# EAGLE board boardfin (EAGLE 9.7.0)
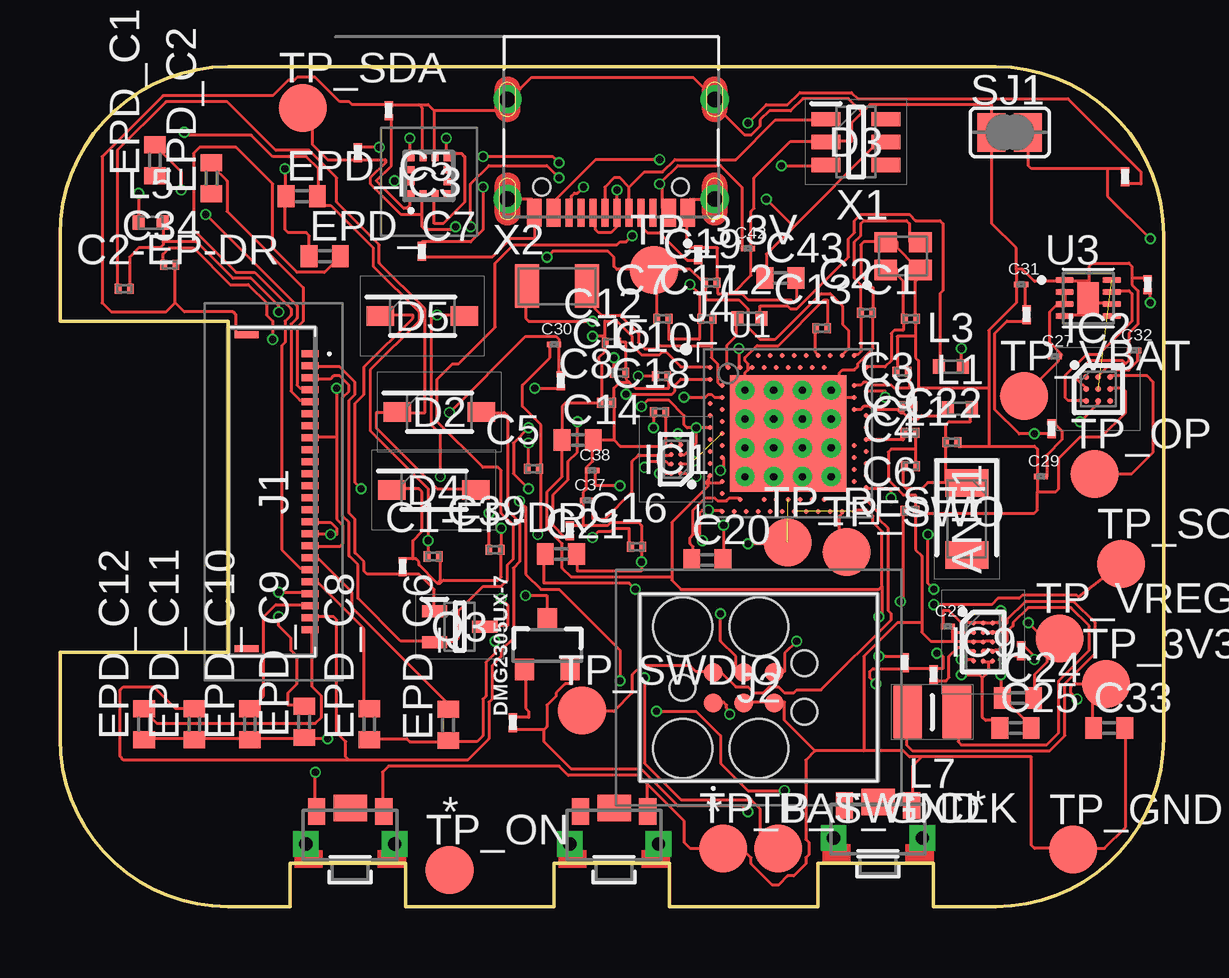
[diagram p0: board, top side]
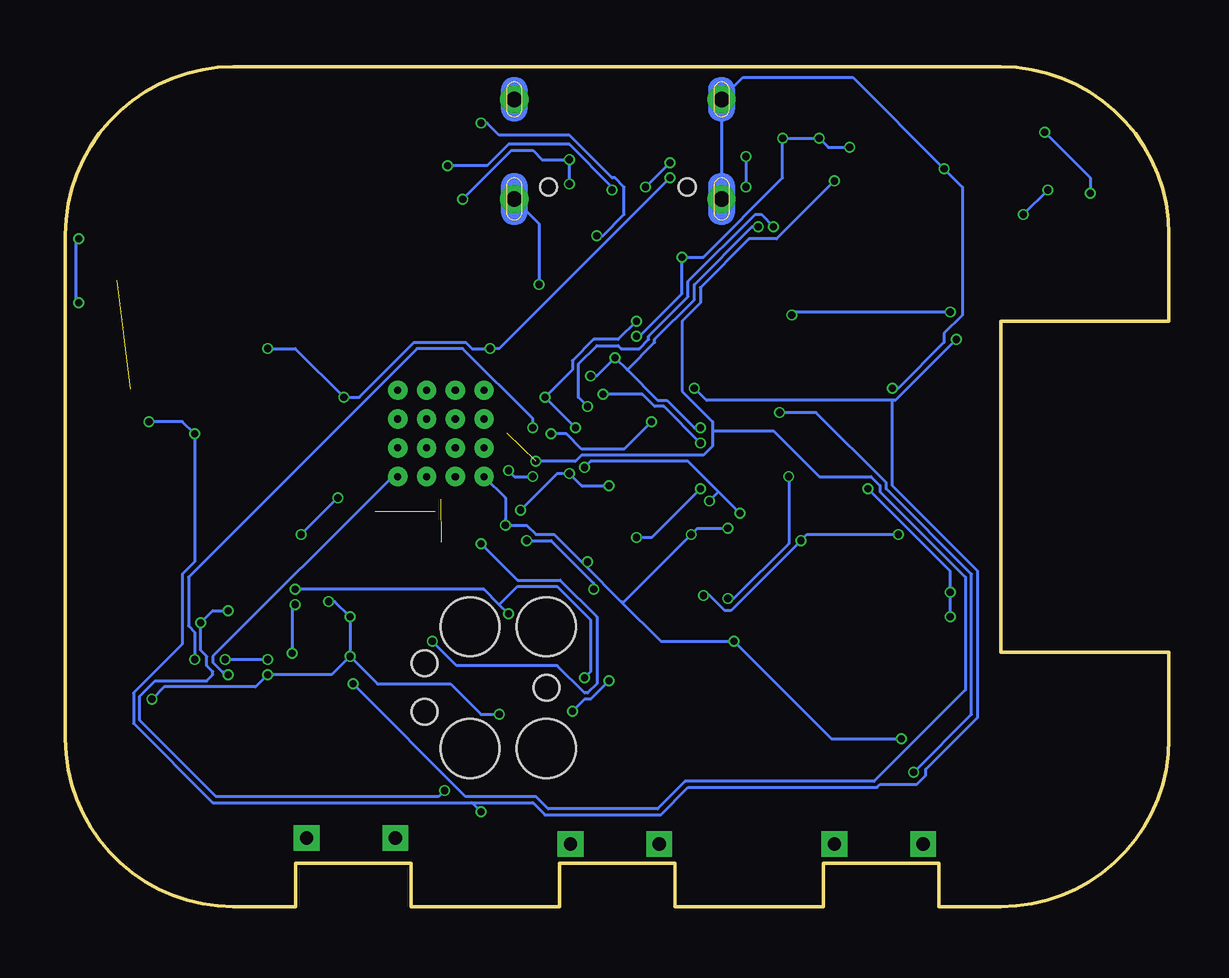
[diagram p1: board, bottom side, seen from below]

Size 46 x 35 mm. Coordinates in mm from the lower left corner, seen from the top.
Outline: 39,0 36.4,0 36.4,1.8 31.6,1.8 31.6,0 25.4,0 25.4,1.8 20.6,1.8 20.6,0 14.4,0 14.4,1.8 9.6,1.8 9.6,0 7,0 arc-90 0,7 0,10.6 7,10.6 7,24.4 0,24.4 0,28 arc-90 7,35 39,35 arc-90 46,28 46,7 arc-90 39,0
Copper layers (1*16): Top / Bottom
Stack-up Default Layer Stack: Top User Defined 0.035mm / Dielectric-1 User Defined 1.6mm / Bottom User Defined 0.035mm
Design rules: minimum drill size 0.3mm, minimum copper width 5mil, keepout clearance 0mil, drill distance 6mil, via restrict clearance 0mil, dimension clearance 0.2mm, restrict clearance 0mil, copper clearance wire_polygon to wire_polygon 5mil, copper clearance wire_polygon to pad_smd 5mil, copper clearance wire_polygon to via 5mil, copper clearance pad_smd to pad_smd 5mil, copper clearance pad_smd to via 5mil, copper clearance via to via 5mil, copper clearance smd to pad (same net) 5mil, copper clearance smd to via (same net) 5mil, copper clearance smd to smd (same net) 5mil

## Footprints (pad centres in the part's own frame; a part is rotated, then mirrored left to right if it is on the bottom)
2450AT18B100E_ANTC3216X140N = smd 1.15 x 1.8: 1 -1.5,0; 2 1.5,0
NORDIC_NRF_3_RESC0201_L = smd 0.28 x 0.43: 1 -0.255,0; 2 0.255,0
ESP32_C6_LIBRARY_1_ESP32_WROVER_EAGLE-LTSPICE_C0402 = smd 0.7 x 0.9: 1 -0.65,0; 2 0.65,0
GRM011R60J152KE01L_2_CAPC0201X13N = smd 0.22 x 0.23: 1 -0.185,0; 2 0.185,0
ESP32_C6_LIBRARY_5_SOD3716X135N = smd 1.15 x 0.8: 1 -1.75,0; 2 1.75,0
ESP32_C6_LIBRARY_3_SOT95P280X145-6N = smd 1.2 x 0.6: 1 -1.25,0.95; 2 -1.25,0; 3 -1.25,-0.95; 4 1.25,-0.95; 5 1.25,0; 6 1.25,0.95
ESP32_C6_LIBRARY_4_ESP32_C6_LIBRARY_4_ESP32_C6_LIBRARY_4_ESP32_C6_LIBRARY_4_ESP32_WROVER_SPARKFUN-DISCRETESEMI_SOT23-3 = smd 0.8 x 0.9: 1 -0.95,-1; 2 0.95,-1; 3 0,1.1
BQ25180YBGR_BGA8C40P2X4_100X155X50 = smd 0.2 x 0.2: A1 -0.2,0.6; A2 0.2,0.6; B1 -0.2,0.2; B2 0.2,0.2; C1 -0.2,-0.2; C2 0.2,-0.2; D1 -0.2,-0.6; D2 0.2,-0.6
DRV2605YZFR_BGA9C50P3X3_144X144X62 = smd 0.25 x 0.25: A1 -0.5,0.5; A2 0,0.5; A3 0.5,0.5; B1 -0.5,0; B2 0,0; B3 0.5,0; C1 -0.5,-0.5; C2 0,-0.5; C3 0.5,-0.5
BMA423_BMA423 = smd 0.3 x 0.35: 1 -0.75,-0.775; 2 -0.25,-0.775; 3 0.25,-0.775; 4 0.75,-0.775; 7 0.75,0.775; 8 0.25,0.775; 9 -0.25,0.775; 10 -0.75,0.775 | smd 0.35 x 0.3: 5 0.775,-0.25; 6 0.775,0.25; 11 -0.775,0.25; 12 -0.775,-0.25
RT6160AWSC_BGA15C40P3X5_140X230X60 = smd 0.216 x 0.216: A1 -0.4,0.8; A2 0,0.8; A3 0.4,0.8; B1 -0.4,0.4; B2 0,0.4; B3 0.4,0.4; C1 -0.4,0; C2 0,0; C3 0.4,0; D1 -0.4,-0.4; D2 0,-0.4; D3 0.4,-0.4; E1 -0.4,-0.8; E2 0,-0.8; E3 0.4,-0.8
503480-2400_5034802400 = smd 0.3 x 0.7: 1 -5.75,1.525; 2 -5.25,1.525; 3 -4.75,1.525; 4 -4.25,1.525; 5 -3.75,1.525; 6 -3.25,1.525; 7 -2.75,1.525; 8 -2.25,1.525; 9 -1.75,1.525; 10 -1.25,1.525; 11 -0.75,1.525; 12 -0.25,1.525; 13 0.25,1.525; 14 0.75,1.525; 15 1.25,1.525; 16 1.75,1.525; 17 2.25,1.525; 18 2.75,1.525; 19 3.25,1.525; 20 3.75,1.525; 21 4.25,1.525; 22 4.75,1.525; 23 5.25,1.525; 24 5.75,1.525 | smd 0.3 x 1: MP1 -6.54,-1.125; MP2 6.54,-1.125
TC2030-IDC_TC2030IDC = smd 0.783 x 0.783: 1 -0.953,-0.635; 2 -0.953,0.635; 3 0.317,-0.635; 4 0.317,0.635; 5 1.588,-0.635; 6 1.588,0.635 | hole 2.451: -2.223,-2.54; -2.223,2.54; 0.952,-2.54; 0.952,2.54 | hole 1.067: -2.223,0; 2.857,-1.016; 2.857,1.016
KH-TYPE-C-16P_KINGHELM_KH-TYPE-C-16P = smd 0.6 x 1.15: A1_B12 -3.2,4.725; A4_B9 -2.4,4.725; A9_B4 2.4,4.725; A12_B1 3.2,4.725 | smd 0.3 x 1.15: A5 -1.25,4.725; A6 -0.25,4.725; A7 0.25,4.725; A8 1.25,4.725; B5 1.75,4.725; B6 0.75,4.725; B7 -0.75,4.725; B8 -1.75,4.725 | drill 0.65 pad 1.05: SH1 -4.32,0; SH2 4.32,0; SH3 -4.32,4.15; SH4 4.32,4.15 | hole 0.7: -2.89,3.65; 2.89,3.65
NORDIC_NRF_2_RESC0402_L = smd 0.5 x 0.6: 1 -0.5,0; 2 0.5,0
MLP2016SR47MT0S1_INDC2016X100N = smd 1.2 x 2.2: 1 -1.028,0; 2 1.028,0
ESP32_C6_LIBRARY_6_SOT65P210X110-3N = smd 1.05 x 0.5: 1 -1.05,0.65; 2 -1.05,-0.65; 3 1.05,0
ERA-1AEB3401C_0201 = smd 0.35 x 0.25: 1 0,0.275; 2 0,-0.275
CPF0201D7K68C1_0201 = smd 0.35 x 0.25: 1 0,0.275; 2 0,-0.275
ESP32_C6_LIBRARY_7_JUMPER_SJ = smd 1.168 x 1.6: 1 -0.762,0; 2 0.762,0
2025-10-22_07-23-44_LIBRARY_SW_EVP-AKE31A_PAN = smd 0.711 x 1.092: 1 -1.4,-0.972; 2 1.4,-0.972 | drill 0.559 pad 0.914 square: 3 -1.848,0.381; 4 1.848,0.381 | smd 1.397 x 1.092: 5 0,-1.124
HECTOR_WATCH_1_TP20R = smd 2 x 2: TP 0,0
NORDIC_NRF_4_AQFN50P700X700X85_HS-74N = smd 4.85 x 4.85: P$74 0,0 | drill 0.3 pad 0.6: P$75 -1.8,1.8; P$76 -0.6,1.8; P$77 0.6,1.8; P$78 1.8,1.8; P$79 -1.8,0.6; P$80 -0.6,0.6; P$81 0.6,0.6; P$82 1.8,0.6; P$83 -1.8,-0.6; P$84 -0.6,-0.6; P$85 0.6,-0.6; P$86 1.8,-0.6; P$87 -1.8,-1.8; P$88 -0.6,-1.8; P$89 0.6,-1.8; P$90 1.8,-1.8 | smd 0.2 x 0.2: P$A8 -1.25,3.25; P$A10 -0.75,3.25; P$A12 -0.25,3.25; P$A14 0.25,3.25; P$A16 0.75,3.25; P$A18 1.25,3.25; P$A20 1.75,3.25; P$A22 2.25,3.25; P$A23 2.75,3.25; P$AA24 3.25,-2.25; P$AB2 -2.75,-2.5; P$AC5 -2,-2.75; P$AC9 -1,-2.75; P$AC11 -0.5,-2.75; P$AC13 0,-2.75; P$AC15 0.5,-2.75; P$AC17 1,-2.75; P$AC19 1.5,-2.75; P$AC21 2,-2.75; P$AC24 3.25,-2.75; P$AD2 -2.75,-3.25; P$AD4 -2.25,-3.25; P$AD6 -1.75,-3.25; P$AD8 -1.25,-3.25; P$AD10 -0.75,-3.25; P$AD12 -0.25,-3.25; P$AD14 0.25,-3.25; P$AD16 0.75,-3.25; P$AD18 1.25,-3.25; P$AD20 1.75,-3.25; P$AD22 2.25,-3.25; P$AD23 2.75,-3.25; P$B1 -3.25,2.75; P$B3 -2.5,2.75; P$B5 -2,2.75; P$B7 -1.5,2.75; P$B9 -1,2.75; P$B11 -0.5,2.75; P$B13 0,2.75; P$B15 0.5,2.75; P$B17 1,2.75; P$B19 1.5,2.75; P$B24 3.25,2.75; P$C1 -3.25,2.25; P$D2 -2.75,2; P$D23 2.75,2; P$E24 3.25,1.75; P$F2 -2.75,1.5; P$F23 2.75,1.5; P$G1 -3.25,1.25; P$H2 -2.75,1; P$H23 2.75,1; P$J1 -3.25,0.75; P$J24 3.25,0.75; P$K2 -2.75,0.5; P$L1 -3.25,0.25; P$L24 3.25,0.25; P$M2 -2.75,0; P$N1 -3.25,-0.25; P$N24 3.25,-0.25; P$P2 -2.75,-0.5; P$P23 2.75,-0.5; P$R1 -3.25,-0.75; P$R24 3.25,-0.75; P$T2 -2.75,-1; P$T23 2.75,-1; P$U1 -3.25,-1.25; P$U24 3.25,-1.25; P$V23 2.75,-1.5; P$W1 -3.25,-1.75; P$W24 3.25,-1.75; P$Y2 -2.75,-2; P$Y23 2.75,-2
ESP32_C6_LIBRARY_SON50P200X200X80-9N = smd 0.76 x 0.27: 1 -0.985,0.75; 2 -0.985,0.25; 3 -0.985,-0.25; 4 -0.985,-0.75; 5 0.985,-0.75; 6 0.985,-0.25; 7 0.985,0.25; 8 0.985,0.75 | smd 0.9 x 1.3: 9 0,0
NORDIC_NRF_BT-XTAL_2016_N = smd 0.95 x 0.85: 1 -0.725,-0.575; 2 0.725,-0.575; 3 0.725,0.575; 4 -0.725,0.575
NORDIC_NRF_1_XTAL_3215_N = smd 1 x 1.8: 1 -1.25,0; 2 1.25,0

## Placement (x,y rotation side)
ANT1  2450AT18B100E  [2450AT18B100E_ANTC3216X140N]  37.8,16.16 270 top
C1  12pF  [NORDIC_NRF_3_RESC0201_L]  35.45,24.5 0 top
C1-EP-DR  10uF  [NORDIC_NRF_3_RESC0201_L]  15.56,14.59 0 top
C2  12pF  [NORDIC_NRF_3_RESC0201_L]  33.62,24.75 0 top
C2-EP-DR  4.7uF/25V  [NORDIC_NRF_3_RESC0201_L]  2.68,25.75 0 top
C3  1pF  [NORDIC_NRF_3_RESC0201_L]  35.34,20.85 0 top
C4  1pF  [NORDIC_NRF_3_RESC0201_L]  35.45,18.35 0 top
C5  100nF  [NORDIC_NRF_3_RESC0201_L]  19.73,18.25 0 top
C6  4.7µF  [NORDIC_NRF_3_RESC0201_L]  35.43,16.5 0 top
C7  100nF  [NORDIC_NRF_3_RESC0201_L]  25.13,24.5 0 top
C8  100nF  [NORDIC_NRF_3_RESC0201_L]  22.78,21 0 top
C9  820pF  [NORDIC_NRF_3_RESC0201_L]  35.43,19.75 0 top
C10  N.C.  [NORDIC_NRF_3_RESC0201_L]  25.08,22.1 0 top
C11  100pF  [NORDIC_NRF_3_RESC0201_L]  35.1,22.29 180 top
C12  100nF  [NORDIC_NRF_3_RESC0201_L]  22.98,23.5 0 top
C13  N.C.  [NORDIC_NRF_3_RESC0201_L]  31.75,24.1 0 top
C14  4.7µF  [ESP32_C6_LIBRARY_1_ESP32_WROVER_EAGLE-LTSPICE_C0402]  21.58,19.45 0 top
C15  1.0µF  [NORDIC_NRF_3_RESC0201_L]  23.33,22.25 0 top
C16  47nF  [NORDIC_NRF_3_RESC0201_L]  24.04,15 0 top
C17  12pF  [NORDIC_NRF_3_RESC0201_L]  26.96,24.5 0 top
C18  12pF  [NORDIC_NRF_3_RESC0201_L]  24.99,20.6 0 top
C19  100nF  [NORDIC_NRF_3_RESC0201_L]  27.13,26 0 top
C20  4.7µF  [ESP32_C6_LIBRARY_1_ESP32_WROVER_EAGLE-LTSPICE_C0402]  26.98,14.45 0 top
C21  4.7µF  [ESP32_C6_LIBRARY_1_ESP32_WROVER_EAGLE-LTSPICE_C0402]  20.88,14.69 0 top
C22  N.C.  [NORDIC_NRF_3_RESC0201_L]  37.17,19.35 0 top
C23  0.1uF  [GRM011R60J152KE01L_2_CAPC0201X13N]  37.01,11.67 0 top
C24  10uF  [ESP32_C6_LIBRARY_1_ESP32_WROVER_EAGLE-LTSPICE_C0402]  39.93,8.7 0 top
C25  22uF  [ESP32_C6_LIBRARY_1_ESP32_WROVER_EAGLE-LTSPICE_C0402]  39.83,7.45 0 top
C27  0.1uF  [GRM011R60J152KE01L_2_CAPC0201X13N]  41.47,22.92 0 top
C29  1uF  [GRM011R60J152KE01L_2_CAPC0201X13N]  40.89,17.92 0 top
C30  1uF  [GRM011R60J152KE01L_2_CAPC0201X13N]  20.6,23.42 0 top
C31  1uF  [GRM011R60J152KE01L_2_CAPC0201X13N]  40.06,25.92 0 top
C32  1uF  [GRM011R60J152KE01L_2_CAPC0201X13N]  44.77,23.17 0 top
C33  22uF  [ESP32_C6_LIBRARY_1_ESP32_WROVER_EAGLE-LTSPICE_C0402]  43.73,7.45 0 top
C34  0.1uF  [NORDIC_NRF_3_RESC0201_L]  4.58,26.75 0 top
C37  1uF  [GRM011R60J152KE01L_2_CAPC0201X13N]  21.98,16.92 0 top
C38  1uF  [GRM011R60J152KE01L_2_CAPC0201X13N]  22.19,18.17 0 top
C39  10uF  [NORDIC_NRF_3_RESC0201_L]  18.14,14.87 0 top
C42  0.1uF  [GRM011R60J152KE01L_2_CAPC0201X13N]  28.68,27.42 0 top
C43  4.7uF  [ESP32_C6_LIBRARY_1_ESP32_WROVER_EAGLE-LTSPICE_C0402]  30.03,26.2 0 top
D2  ESP32_C6_LIBRARY_5_MBR0530  [ESP32_C6_LIBRARY_5_SOD3716X135N]  15.82,20.61 0 top
D3  USBLC6-2SC6Y  [ESP32_C6_LIBRARY_3_SOT95P280X145-6N]  33.18,31.86 0 top
D4  ESP32_C6_LIBRARY_5_MBR0530  [ESP32_C6_LIBRARY_5_SOD3716X135N]  15.59,17.36 0 top
D5  ESP32_C6_LIBRARY_5_MBR0530  [ESP32_C6_LIBRARY_5_SOD3716X135N]  15.11,24.61 0 top
DMG2305UX-7  20V/4.2A/52mΩ/1.4W  [ESP32_C6_LIBRARY_4_ESP32_C6_LIBRARY_4_ESP32_C6_LIBRARY_4_ESP32_C6_LIBRARY_4_ESP32_WROVER_SPARKFUN-DISCRETESEMI_SOT23-3]  20.31,10.88 0 top
EPD_C1  1uF/50V  [ESP32_C6_LIBRARY_1_ESP32_WROVER_EAGLE-LTSPICE_C0402]  3.96,31.1 90 top
EPD_C2  1uF/50V  [ESP32_C6_LIBRARY_1_ESP32_WROVER_EAGLE-LTSPICE_C0402]  6.32,30.35 90 top
EPD_C5  0.1uF/50V  [ESP32_C6_LIBRARY_1_ESP32_WROVER_EAGLE-LTSPICE_C0402]  10.08,29.6 0 top
EPD_C6  1uF/50V  [ESP32_C6_LIBRARY_1_ESP32_WROVER_EAGLE-LTSPICE_C0402]  16.18,7.57 90 top
EPD_C7  1uF/50V  [ESP32_C6_LIBRARY_1_ESP32_WROVER_EAGLE-LTSPICE_C0402]  11.04,27.1 0 top
EPD_C8  1uF/50V  [ESP32_C6_LIBRARY_1_ESP32_WROVER_EAGLE-LTSPICE_C0402]  12.9,7.6 90 top
EPD_C9  1uF/50V  [ESP32_C6_LIBRARY_1_ESP32_WROVER_EAGLE-LTSPICE_C0402]  10.18,7.7 90 top
EPD_C10  1uF/50V  [ESP32_C6_LIBRARY_1_ESP32_WROVER_EAGLE-LTSPICE_C0402]  7.92,7.6 90 top
EPD_C11  1uF/50V  [ESP32_C6_LIBRARY_1_ESP32_WROVER_EAGLE-LTSPICE_C0402]  5.6,7.6 90 top
EPD_C12  1uF/50V  [ESP32_C6_LIBRARY_1_ESP32_WROVER_EAGLE-LTSPICE_C0402]  3.51,7.6 90 top
IC1  BQ25180YBGR  [BQ25180YBGR_BGA8C40P2X4_100X155X50]  25.68,18.64 180 top
IC2  DRV2605YZFR  [DRV2605YZFR_BGA9C50P3X3_144X144X62]  43.28,21.57 0 top
IC3  BMA421  [BMA423_BMA423]  15.38,30.45 0 top
IC9  RT6160AWSC  [RT6160AWSC_BGA15C40P3X5_140X230X60]  38.48,11.03 0 top
J1  503480-2400  [503480-2400_5034802400]  8.9,17.29 270 top
J2  TC2030-IDC  [TC2030-IDC_TC2030IDC]  28.18,9.13 0 top
J4  KH-TYPE-C-16P  [KH-TYPE-C-16P_KINGHELM_KH-TYPE-C-16P]  22.97,33.64 180 top
L1  3.9nH  [NORDIC_NRF_2_RESC0402_L]  37.51,20.75 0 top
L2  10µH  [NORDIC_NRF_2_RESC0402_L]  28.73,24.5 0 top
L3  15nH  [NORDIC_NRF_2_RESC0402_L]  37.13,22.5 0 top
L5  68uH  [NORDIC_NRF_2_RESC0402_L]  3.78,28.5 0 top
L7  FTC252012SR47MBCA  [MLP2016SR47MT0S1_INDC2016X100N]  36.36,8.11 0 top
Q3  SI1308EDL-T1-GE3  [ESP32_C6_LIBRARY_6_SOT65P210X110-3N]  16.66,11.67 0 top
R1_EP_DR  0.47  [ERA-1AEB3401C_0201]  44.4,30.42 0 top
R1_USB  5K1  [CPF0201D7K68C1_0201]  26.61,27.17 0 top
R2  0  [CPF0201D7K68C1_0201]  40.07,10.67 0 top
R2_EP_DR  10K  [ERA-1AEB3401C_0201]  14.28,14.17 0 top
R2_USB  5K1  [ERA-1AEB3401C_0201]  15.08,27.31 0 top
R3  0  [ERA-1AEB3401C_0201]  13.7,33.17 0 top
R4  0  [CPF0201D7K68C1_0201]  36.41,9.67 0 top
R5  10k  [CPF0201D7K68C1_0201]  20.87,21.92 0 top
R7  10k  [CPF0201D7K68C1_0201]  41.33,19.92 0 top
R8  10k  [CPF0201D7K68C1_0201]  40.29,24.67 0 top
R9  10K  [ERA-1AEB3401C_0201]  21.25,15.67 0 top
R17  3K3  [CPF0201D7K68C1_0201]  35.21,10.17 0 top
R18  3K3  [CPF0201D7K68C1_0201]  12.42,31.42 0 top
R_PWR_EPD  10K  [CPF0201D7K68C1_0201]  18.88,7.67 0 top
R_TYPE_SEL  2.2  [ERA-1AEB3401C_0201]  45.34,25.92 0 top
SJ1  [ESP32_C6_LIBRARY_7_JUMPER_SJ]  39.59,32.26 0 top
SW_DN  2025-10-22_07-23-44_LIBRARY_EVP-AKE31ASW_EVP-AKE31A_PAN  [2025-10-22_07-23-44_LIBRARY_SW_EVP-AKE31A_PAN]  34.1,3.24 180 top
SW_ENT  2025-10-22_07-23-44_LIBRARY_EVP-AKE31ASW_EVP-AKE31A_PAN  [2025-10-22_07-23-44_LIBRARY_SW_EVP-AKE31A_PAN]  23.1,2.99 180 top
SW_UP  2025-10-22_07-23-44_LIBRARY_EVP-AKE31ASW_EVP-AKE31A_PAN  [2025-10-22_07-23-44_LIBRARY_SW_EVP-AKE31A_PAN]  12.1,2.99 180 top
TP_3.3V  HECTOR_WATCH_1_TPTP20R  [HECTOR_WATCH_1_TP20R]  24.76,26.53 0 top
TP_3V3  HECTOR_WATCH_1_TPTP20R  [HECTOR_WATCH_1_TP20R]  43.61,9.28 0 top
TP_BAT_GND  HECTOR_WATCH_1_TPTP20R  [HECTOR_WATCH_1_TP20R]  27.64,2.43 0 top
TP_GND  HECTOR_WATCH_1_TPTP20R  [HECTOR_WATCH_1_TP20R]  42.23,2.38 0 top
TP_ON  HECTOR_WATCH_1_TPTP20R  [HECTOR_WATCH_1_TP20R]  16.24,1.53 0 top
TP_OP  HECTOR_WATCH_1_TPTP20R  [HECTOR_WATCH_1_TP20R]  43.12,18.03 0 top
TP_RESET  HECTOR_WATCH_1_TPTP20R  [HECTOR_WATCH_1_TP20R]  30.33,15.18 0 top
TP_SCL  HECTOR_WATCH_1_TPTP20R  [HECTOR_WATCH_1_TP20R]  44.23,14.28 0 top
TP_SDA  HECTOR_WATCH_1_TPTP20R  [HECTOR_WATCH_1_TP20R]  10.12,33.28 0 top
TP_SWDCLK  HECTOR_WATCH_1_TPTP20R  [HECTOR_WATCH_1_TP20R]  29.94,2.43 0 top
TP_SWDIO  HECTOR_WATCH_1_TPTP20R  [HECTOR_WATCH_1_TP20R]  21.76,8.18 0 top
TP_SWO  HECTOR_WATCH_1_TPTP20R  [HECTOR_WATCH_1_TP20R]  32.79,14.78 0 top
TP_VBAT  HECTOR_WATCH_1_TPTP20R  [HECTOR_WATCH_1_TP20R]  40.18,21.28 0 top
TP_VREG  HECTOR_WATCH_1_TPTP20R  [HECTOR_WATCH_1_TP20R]  41.67,11.18 0 top
U1  NRF52840_QF  [NORDIC_NRF_4_AQFN50P700X700X85_HS-74N]  30.35,19.72 0 top
U3  MAX17048G+T10  [ESP32_C6_LIBRARY_SON50P200X200X80-9N]  42.86,25.36 0 top
X1  32MHz  [NORDIC_NRF_BT-XTAL_2016_N]  35.14,27.11 0 top
X2  32.768kHz  [NORDIC_NRF_1_XTAL_3215_N]  20.72,25.86 0 top

## Library data of the parts
ANT1 = InkTime_v5 (1); ARROW_PART_NUMBER: 2450AT18B100E; ARROW_PRICE-STOCK: https://www.arrow.com/en/products/2450at18b100e/johanson-dielectrics?utm_currency=USD&region=nac; DESCRIPTION: Antennas 2.45GHz ANTENNA; HEIGHT: 1.4mm; MANUFACTURER_NAME: JOHANSON TECHNOLOGY; MANUFACTURER_PART_NUMBER: 2450AT18B100E; MOUSER_PART_NUMBER: 609-2450AT18B100E; MOUSER_PRICE-STOCK: https://www.mouser.co.uk/ProductDetail/Johanson-Technology/2450AT18B100E?qs=yCnrNFeXz%252Bh5MFsFIXGZGA%3D%3D
C1 C1-EP-DR C2 C2-EP-DR C3-C13 C15-C19 C22 C34 C39 L1-L3 L5 R1_EP_DR R1_USB R2 R2_EP_DR R2_USB R3-R5 R7-R9 R17 R18 R_PWR_EPD R_TYPE_SEL SJ1 TP_3.3V TP_3V3 TP_BAT_GND TP_GND TP_ON TP_OP TP_RESET TP_SCL TP_SDA TP_SWDCLK TP_SWDIO TP_SWO TP_VBAT TP_VREG U1 X1 X2 = InkTime_v5 (1)
C14 C20 C21 C24 C25 C33 C43 EPD_C1 EPD_C2 EPD_C5-EPD_C12 = InkTime_v5 (1); SPICEMODEL: NONE; SPICEPREFIX: C
C23 C27 C29-C32 C37 C38 C42 = InkTime_v5 (1); AVAILABILITY: In Stock; CHECK_PRICES: https://www.snapeda.com/parts/GRM011R60J152KE01L/Murata/view-part/?ref=eda; DESCRIPTION: SMD Capacitor X5R(EIA) with Capacitance: 1500pF Tol. 10%. Rated Voltage: 6.3Vdc; MF: Murata; MP: GRM011R60J152KE01L; PACKAGE: 0201 Murata; PRICE: None; SNAPEDA_LINK: https://www.snapeda.com/parts/GRM011R60J152KE01L/Murata/view-part/?ref=snap
D2 D4 D5 = InkTime_v5 (1); AVAILABILITY: In Stock; CHECK_PRICES: https://www.snapeda.com/parts/MBR0530/Onsemi/view-part/?ref=eda; DESCRIPTION: Diode Schottky 30 V 500mA Surface Mount SOD-123; MF: ON Semiconductor; MP: MBR0530; PACKAGE: SOD-123-2 ON Semiconductor; PRICE: None; PURCHASE-URL: https://www.snapeda.com/api/url_track_click_mouser/?unipart_id=179458&manufacturer=ON Semiconductor&part_name=MBR0530&search_term=None; SNAPEDA_LINK: https://www.snapeda.com/parts/MBR0530/Onsemi/view-part/?ref=snap
D3 = InkTime_v5 (1); AVAILABILITY: In Stock; CHECK_PRICES: https://www.snapeda.com/parts/USBLC6-2SC6Y/STMicroelectronics/view-part/?ref=eda; DESCRIPTION: 17V Clamp 5A (8/20µs) Ipp Tvs Diode Surface Mount SOT-23-6; MF: STMicroelectronics; MP: USBLC6-2SC6Y; PACKAGE: SOT-23-6 STMicroelectronics; PRICE: None; SNAPEDA_LINK: https://www.snapeda.com/parts/USBLC6-2SC6Y/STMicroelectronics/view-part/?ref=snap
DMG2305UX-7 = InkTime_v5 (1); PROD_ID: TRAN-14388
IC1 = InkTime_v5 (1); ARROW_PART_NUMBER: BQ25180YBGR; ARROW_PRICE-STOCK: https://www.arrow.com/en/products/bq25180ybgr/texas-instruments?utm_currency=USD&region=nac; DESCRIPTION: Charger IC Lithium Ion/Polymer, Lithium Iron Phosphate 8-DSBGA (1.6x1.1); HEIGHT: 0.5mm; MANUFACTURER_NAME: Texas Instruments; MANUFACTURER_PART_NUMBER: BQ25180YBGR; MOUSER_PART_NUMBER: 595-BQ25180YBGR; MOUSER_PRICE-STOCK: https://www.mouser.co.uk/ProductDetail/Texas-Instruments/BQ25180YBGR?qs=doiCPypUmgEWjAK%252BJAX6Tw%3D%3D
IC2 = InkTime_v5 (1); ARROW_PART_NUMBER: DRV2605YZFR; ARROW_PRICE-STOCK: https://www.arrow.com/en/products/drv2605yzfr/texas-instruments?region=nac; DESCRIPTION: Haptic Driver for ERM/LRA with Built-In Library and Smart Loop Architecture; HEIGHT: 0.625mm; MANUFACTURER_NAME: Texas Instruments; MANUFACTURER_PART_NUMBER: DRV2605YZFR
IC3 = InkTime_v5 (1); ARROW_PART_NUMBER: BMA423; ARROW_PRICE-STOCK: https://www.arrow.com/en/products/bma423/bosch; DESCRIPTION: Accelerometers Triaxial low-g 12bit Acceleration Sensor; HEIGHT: 1mm; MANUFACTURER_NAME: BOSCH; MANUFACTURER_PART_NUMBER: BMA423; MOUSER_PART_NUMBER: 262-BMA423; MOUSER_PRICE-STOCK: https://www.mouser.co.uk/ProductDetail/Bosch-Sensortec/BMA423?qs=HXFqYaX1Q2xC%252BSgeGoX3mg%3D%3D
IC9 = InkTime_v5 (1); DESCRIPTION: Buck-Boost Regulator Positive Output Step-Up/Step-Down I2C DC-DC Controller IC 15-WL-CSP (BSC) (1.4x2.3); HEIGHT: 0.6mm; MANUFACTURER_NAME: RICHTEK; MANUFACTURER_PART_NUMBER: RT6160AWSC; MOUSER_PART_NUMBER: 835-RT6160AWSC; MOUSER_PRICE-STOCK: https://www.mouser.co.uk/ProductDetail/Richtek/RT6160AWSC?qs=amGC7iS6iy%2FLd9PSoixZXQ%3D%3D
J1 = InkTime_v5 (1); DESCRIPTION: FFC & FPC Connectors 0.5mm FPC RA SMT Dual Contact 24Ckt; HEIGHT: 1.87mm; MANUFACTURER_NAME: Molex; MANUFACTURER_PART_NUMBER: 503480-2400; MOUSER_PART_NUMBER: 538-503480-2400; MOUSER_PRICE-STOCK: https://www.mouser.co.uk/ProductDetail/Molex/503480-2400?qs=OAhjpuo3Vu7efIoxFh9AOw%3D%3D
J2 = InkTime_v5 (1); DESCRIPTION: CABLE ADAPTER 6 POS; HEIGHT: 19mm; MANUFACTURER_NAME: Tag Connect; MANUFACTURER_PART_NUMBER: TC2030-IDC
J4 = InkTime_v5 (1); AVAILABILITY: Not in stock; CHECK_PRICES: https://www.snapeda.com/parts/KH-TYPE-C-16P/Kinghelm/view-part/?ref=eda; MF: kinghelm; MP: KH-TYPE-C-16P; PACKAGE: None; PRICE: None; SNAPEDA_LINK: https://www.snapeda.com/parts/KH-TYPE-C-16P/Kinghelm/view-part/?ref=snap
L7 = InkTime_v5 (1); DESCRIPTION: SMD / SMT Inductors (Coils), L=0.47?H, L x W x T :; HEIGHT: 1mm; JLCPCB: https://jlcpcb.com/partdetail/6763488-FTC252012SR47MBCA/C5832368; MANUFACTURER_NAME: TDK; MANUFACTURER_PART_NUMBER: FTC252012SR47MBCA
Q3 = InkTime_v5 (1); AVAILABILITY: In Stock; CHECK_PRICES: https://www.snapeda.com/parts/SI1308EDL-T1-GE3/Vishay+Siliconix/view-part/?ref=eda; DESCRIPTION: Si1308EDL-T1-GE3 N-channel MOSFET Transistor, 1.5 A, 30 V, 3-Pin SC-70 | Siliconix / Vishay SI1308EDL-T1-GE3; MF: Vishay Siliconix; MP: SI1308EDL-T1-GE3; PACKAGE: SOT-323 Vishay Semiconductor; PRICE: None; PURCHASE-URL: https://www.snapeda.com/api/url_track_click_mouser/?unipart_id=274603&manufacturer=Vishay Siliconix&part_name=SI1308EDL-T1-GE3&search_term=None; SNAPEDA_LINK: https://www.snapeda.com/parts/SI1308EDL-T1-GE3/Vishay+Siliconix/view-part/?ref=snap
SW_DN SW_ENT SW_UP = InkTime_v5 (1); COPYRIGHT: Copyright (C) 2025 Ultra Librarian. All rights reserved.; DIGI-KEY_PART_NUMBER_1: P123437TR-ND; DIGI-KEY_PART_NUMBER_2: P123437CT-ND; DIGI-KEY_PART_NUMBER_3: P123437DKR-ND; MANUFACTURER_NAME: Panasonic; MANUFACTURER_PART_NUMBER: EVP-AKE31A
U3 = InkTime_v5 (1); AVAILABILITY: In Stock; CHECK_PRICES: https://www.snapeda.com/parts/MAX17048G+T10/Analog+Devices/view-part/?ref=eda; DESCRIPTION: 3µA 1-Cell/2-Cell Fuel Gauge with ModelGauge; MF: Analog Devices; MP: MAX17048G+T10; PACKAGE: TDFN-8 Maxim; PRICE: None; PURCHASE-URL: https://www.snapeda.com/api/url_track_click_mouser/?unipart_id=329239&manufacturer=Analog Devices&part_name=MAX17048G+T10&search_term=None; SNAPEDA_LINK: https://www.snapeda.com/parts/MAX17048G+T10/Analog+Devices/view-part/?ref=snap

## Nets
3V3/1.7D: C34.1 DMG2305UX-7.2 IC2.C2 R5.2 R7.2 R8.2 R_PWR_EPD.2
3V3/2.4A: C6.1 C7.1 C8.1 C12.1 C14.1 C19.1 C25.1 C33.1 IC3.3 IC3.7 IC3.10 IC9.E2 IC9.E3 J2.1 R17.1 R18.1 TP_3.3V.TP TP_3V3.TP U1.P$A22 U1.P$AD14 U1.P$AD23 U1.P$B1 U1.P$W1 U1.P$Y2
ALERT/1.6C: U3.5
ALERT/2.5C: U1.P$J24
D+/1.5D: D3.4
D+/2.7D: U1.P$AD6
D-/1.5D: D3.6
D-/2.7D: U1.P$AD4
DN: D3.1 J4.A7 J4.B7
DP: D3.3 J4.A6 J4.B6
EPD_3V3: C1-EP-DR.1 DMG2305UX-7.3 EPD_C5.2 J1.15 J1.16 L5.1
EPD_BUSY/1.5D: J1.9
EPD_BUSY/2.2D: U1.P$AD12
EPD_CS/1.4C: J1.12
EPD_CS/2.2D: U1.P$K2
EPD_DC/1.5D: J1.11
EPD_DC/2.2D: U1.P$AD10
EPD_RST/1.5D: J1.10
EPD_RST/2.2D: U1.P$AC11
GDR: J1.2 Q3.1 R2_EP_DR.2
GND: C1-EP-DR.2 C1.2 C2.2 C3.2 C4.2 C5.2 C6.2 C7.2 C8.2 C9.2 C10.2 C11.2 C12.2 C13.2 C14.2 C15.2 C16.2 C17.1 C18.2 C19.2 C20.2 C21.2 C22.2 C23.2 C24.1 C25.2 C29.1 C30.1 C31.1 C32.1 C33.2 C34.2 C37.1 C38.1 C39.2 C42.2 C43.2 D3.2 D4.1 EPD_C5.1 EPD_C6.1 EPD_C7.1 EPD_C8.1 EPD_C9.1 EPD_C10.1 EPD_C11.1 EPD_C12.1 IC1.D2 IC2.B1 IC2.B3 IC3.8 IC3.9 IC9.B1 IC9.C1 IC9.C2 IC9.C3 J1.8 J1.17 J1.MP1 J2.3 J2.5 J4.A1_B12 J4.A12_B1 J4.SH1 J4.SH2 J4.SH3 J4.SH4 R1_USB.1 R2_EP_DR.1 R2_USB.2 R3.1 R9.1 R_TYPE_SEL.1 SJ1.1 SW_DN.1 SW_ENT.1 SW_UP.1 TP_BAT_GND.TP TP_GND.TP U1.P$74 U1.P$75 U1.P$76 U1.P$77 U1.P$78 U1.P$79 U1.P$80 U1.P$81 U1.P$82 U1.P$83 U1.P$84 U1.P$85 U1.P$86 U1.P$87 U1.P$88 U1.P$89 U1.P$90 U1.P$B7 U1.P$F23 U3.1 U3.4 U3.6 U3.9 X1.2 X1.4
HAPTIC_EN/1.4C: IC2.A1
HAPTIC_EN/2.6A: U1.P$U1
IMU_INT1: U1.P$N1
IMU_INT2: U1.P$P2
JJ: C10.1 C15.1 C16.1 L3.2 U1.P$B5 U1.P$E24
LX1: IC9.B2 IC9.B3 L7.1
LX2: IC9.D2 IC9.D3 L7.2
MOSI/1.5B: J1.14
MOSI/2.2D: U1.P$B13
MU_INT1: IC3.5
MU_INT2: IC3.6
N$1: IC1.D1 R9.2
N$2: IC9.D1 R4.2
N$3: IC9.E1 R2.2
N$4: IC3.1 R3.2
N$5: C20.1 U1.P$AC5
N$6: C18.1 U1.P$F2 X2.1
N$7: C17.2 U1.P$D2 X2.2
N$8: C5.1 U1.P$C1
N$9: C9.1 U1.P$N24
N$10: L2.1 U1.P$B3
N$11: L2.2 L3.1
N$12: C3.1 L1.1 U1.P$H23
N$13: ANT1.1 C4.1 C22.1 L1.2
N$14: C11.1 U1.P$D23
N$15: C2.1 U1.P$A23 X1.3
N$16: C1.1 U1.P$B24 X1.1
N$17: C2-EP-DR.2 D5.2 L5.2 Q3.3
N$18: C2-EP-DR.1 D2.1 D4.2
N$20: R1_EP_DR.1 R_TYPE_SEL.2 SJ1.2
N$21: J1.MP2
N$22: C13.1 U1.P$A18
N$23: C32.2 IC2.A2
N$24: EPD_C2.2 J1.4
N$25: EPD_C1.2 J1.5
N$26: EPD_C2.1
N$27: EPD_C1.1
N$28: EPD_C6.2 J1.18
N$29: EPD_C7.2 J1.19
N$30: EPD_C8.2 J1.20
N$31: J4.A5 R1_USB.2
N$32: EPD_C10.2 J1.22
N$33: C31.2 R8.1
N$34: EPD_C12.2 J1.24
N$35: J4.B5 R2_USB.1
N$36: C29.2 R7.1
OUT: IC2.C3
OUT+: IC2.A3 TP_OP.TP
OUT-: TP_ON.TP
P0.04: U1.P$J1
P0.09: U1.P$L24
P0.13/1.5D: C30.2 R5.1 SW_UP.2
P0.13/2.6C: U1.P$AD8
P0.14/1.5D: SW_ENT.2
P0.14/2.7C: U1.P$AC9
P0.19: U1.P$AC15
P0.20: U1.P$AD16
P0.21: U1.P$AC17
P0.22: U1.P$AD18
P0.23: U1.P$AC19
P0.24: U1.P$AD20
P0.25: U1.P$AC21
P0.26: U1.P$G1
P0.27: U1.P$H2
P0.28: U1.P$B11
P0.29: U1.P$A10
P0.30: U1.P$B9
P0.31: U1.P$A8
P1.01/1.6C: DMG2305UX-7.1 R_PWR_EPD.1
P1.01/2.4B: U1.P$Y23
P1.02/1.6C: SW_DN.2
P1.02/2.8C: U1.P$W24
P1.03: U1.P$V23
P1.04: U1.P$U24
P1.05: U1.P$T23
P1.06: U1.P$R24
P1.07: U1.P$P23
P1.09: U1.P$R1
P1.10: U1.P$A20
P1.11: U1.P$B19
P1.12: U1.P$B17
P1.13: U1.P$A16
P1.14: U1.P$B15
P1.15: U1.P$A14
PMIC_INT: IC1.A1 U1.P$T2
PREVGH: D5.1 EPD_C9.2 J1.21
PREVGL: D2.2 EPD_C11.2 J1.23
RESE: J1.3 Q3.2 R1_EP_DR.2
RESET: J2.6 TP_RESET.TP U1.P$AC13
SCK/1.5B: J1.13
SCK/2.2D: U1.P$A12
SCL/1.4C: IC2.C1 U3.7
SCL/2.4C: IC1.B1 IC3.12 R4.1 R17.2 TP_SCL.TP U1.P$M2
SDA/1.4C: IC2.B2 U3.8
SDA/2.4C: IC1.C1 IC3.2 R2.1 R18.2 TP_SDA.TP U1.P$L1
SWDCLK: J2.4 TP_SWDCLK.TP U1.P$AA24
SWDIO: J2.2 TP_SWDIO.TP U1.P$AC24
SWO: TP_SWO.TP U1.P$AD22
VBAT/1.2A: C27.2 TP_VBAT.TP U3.2 U3.3
VBAT/2.5C: C37.2 IC1.C2
VBUS/1.5D: C42.1 C43.1 D3.5 J4.A4_B9 J4.A9_B4
VBUS/2.6D: C21.1 C38.2 IC1.A2 U1.P$AD2
VREG: C23.1 C24.2 C39.1 IC1.B2 IC9.A1 IC9.A2 IC9.A3 TP_VREG.TP

## Tracks (layer width: path | path; a pad name or v marks a point on that pad's centre or on a via)
3V3/1.7D  (via drill 0.3)
  Top 0.127: v19.79,21.61 20.8,21.61 R5.2 | v8.87,23.64 8.87,24.4 8.61,24.65 8.61,25.16 7.85,25.92 7.09,25.92 5.56,27.45 4.55,27.45 4.3,27.19 4.3,26.81 C34.1 | 20.17,7.38 18.9,7.38 R_PWR_EPD.2 | 20.17,7.38 20.3,7.51 20.3,8.4 20.68,8.78 20.68,8.91 21.06,9.29 21.31,9.29 21.31,9.79 DMG2305UX-7.2 | v42.52,20.21 43.28,20.97 IC2.C2 | R7.2 41.25,19.7 v40.62,19.7 39.98,19.7 38.97,20.72 38.97,23.89 39.47,24.4 40.24,24.4 R8.2 | 20.17,7.38 20.17,6.87 21.31,5.73 24.23,5.73 25.76,4.21 28.42,4.21 v28.68,3.95
  Bottom 0.127: v19.79,21.61 19.28,21.1 11.53,21.1 | 11.53,21.1 11.41,21.1 v8.87,23.64 | v42.52,20.21 41.12,20.21 v40.62,19.7 40.62,14.37 41.12,13.86 41.12,10.94 43.16,8.91 43.16,7.63 39.86,4.33 29.06,4.33 | 29.06,4.33 v28.68,3.95 | 11.53,21.1 11.53,17.54 7.98,13.98 7.98,7.89 10.14,5.73 10.14,5.48 10.52,5.09 12.04,5.09 12.17,4.97 20.04,4.97 21.19,3.83 26.01,3.83 26.52,4.33 29.06,4.33
3V3/2.4A  (via drill 0.3)  (1 unrouted)
  Top 0.127: 16.11,31.38 16.74,31.38 16.87,31.26 16.87,29.35 15.98,28.46 15.6,28.46 15.6,29.61 IC3.3 | 16.11,31.38 16.11,31.26 IC3.7 16.11,31.38 | v14.58,32.02 14.58,31.26 IC3.10 | 16.11,31.38 v16.11,32.02 | v13.31,31.64 12.42,31.64 R18.1 | C7.1 24.87,24.53 24.87,26.43 TP_3.3V.TP | U1.P$A22 32.62,23 32.87,23.26 32.87,24.02 32.62,24.27 32.62,25.03 32.11,25.54 31.73,25.54 29.82,23.64 29.19,23.64 28.68,24.14 28.68,24.91 28.3,25.29 26.9,25.29 26.9,25.92 C19.1 26.77,26.05 26.27,26.56 24.87,26.56 TP_3.3V.TP | v20.3,27.07 20.55,27.32 22.84,27.32 23.09,27.07 23.09,26.69 23.22,26.56 24.74,26.56 TP_3.3V.TP | 22.71,23.76 C12.1 22.71,23.38 22.71,23.13 22.46,22.88 22.46,22.75 22.58,22.62 22.58,21.1 C8.1 22.46,20.97 21.06,20.97 20.93,20.84 20.93,19.57 C14.1 20.93,17.92 20.3,17.29 20.3,15.76 20.93,15.13 20.93,14.11 21.31,13.73 25.5,13.73 | 22.71,23.76 22.71,24.4 23.22,24.4 23.85,23.76 23.85,23.38 24.23,23 25,23 25.12,23.13 25.25,23.13 25.89,22.49 27.03,22.49 U1.P$B1 | 43.03,9.29 43.03,7.51 C33.1 | 43.03,9.29 43.54,9.29 TP_3V3.TP 43.03,9.29 | 38.71,10.17 38.84,10.17 IC9.E3 | 38.71,10.17 38.46,10.17 IC9.E2 | 38.71,10.17 38.71,9.79 38.46,9.54 | 38.46,9.54 38.46,7.89 38.58,7.76 39.22,7.76 39.22,7.51 C25.1 | 27.03,17.8 27.03,17.92 U1.P$W1 | 27.03,17.8 27.03,17.67 27.54,17.67 U1.P$Y2 | 34.27,13.35 34.27,15.64 33.89,16.02 33.89,16.27 33.63,16.52 33.12,16.52 U1.P$AD23 | 34.27,13.35 34.14,13.22 25.89,13.22 25.5,13.6 25.5,13.73 | 25.5,13.73 25.5,16.02 27.03,17.54 26.9,17.67 27.03,17.8 | v34.14,10.43 35.16,10.43 R17.1 | v34.14,12.08 34.27,12.21 34.27,13.35 | v35.03,12.72 35.16,12.84 35.16,16.4 C6.1
  Top 0.127: v27.92,8.02 27.92,8.14 27.79,8.27 27.79,8.4 27.66,8.52 27.28,8.52 J2.1 | 38.46,9.54 38.33,9.67 v37.57,9.67 | 43.03,9.29 42.27,9.29 42.14,9.16 42.14,8.91 v42.39,8.65 | 22.71,23.76 v22.2,23.76
  Bottom 0.127: v13.31,31.64 14.2,31.64 v14.58,32.02 v16.11,32.02 16.11,30.37 19.41,27.07 v20.3,27.07 20.3,25.54 22.08,23.76 v22.2,23.76 | v34.14,10.43 v34.14,12.08 34.78,12.72 v35.03,12.72 | v27.92,8.02 28.68,8.02 29.95,9.29 33,9.29 v34.14,10.43 | v34.14,10.43 34.9,9.67 v37.57,9.67 38.08,9.16 41.89,9.16 v42.39,8.65
DN
  Top 0.127: 23.73,29.99 23.34,30.37 23.09,30.37 22.71,29.99 22.71,28.97 J4.A7 | 23.73,29.99 23.73,28.97 J4.B7 | 23.73,29.99 24.36,30.62 25.12,30.62 25.63,31.13 28.17,31.13 29.82,32.78 31.85,32.78 D3.1
DP  (via drill 0.3)
  Top 0.127: J4.B6 22.33,28.84 22.33,28.21 22.46,28.08 22.96,28.08 23.22,28.34 23.22,28.84 J4.A6 23.22,28.97 v23.22,29.86 | v30.08,30.88 31.85,30.88 D3.3
  Bottom 0.127: v30.08,30.88 28.42,30.88 27.54,31.77 25,31.77 23.22,29.99 v23.22,29.86
EPD_3V3  (via drill 0.3)
  Top 0.127: J1.16 10.52,15.51 v11.28,15.51 11.53,15.51 11.53,15.76 11.28,16.02 10.52,16.02 J1.15 | C1-EP-DR.1 15.34,14.62 v15.34,15.25 15.34,17.41 12.93,19.83 12.93,22.37 14.96,24.4 14.96,24.78 13.06,26.69 13.06,27.45 11.28,29.22 10.77,29.22 10.77,29.48 EPD_C5.2 10.77,29.61 10.77,30.75 10.26,31.26 8.87,31.26 7.98,32.15 5.31,32.15 v5.18,32.27 | v3.28,29.73 3.28,28.59 L5.1 | v19.41,12.97 20.3,12.97 20.3,12.08 DMG2305UX-7.3
  Bottom 0.127: v3.28,29.73 3.28,30.37 v5.18,32.27 | v19.41,12.97 19.15,12.97 18.52,12.33 18.27,12.33 v15.34,15.25 15.09,15.51 v11.28,15.51
GDR
  Top 0.127: Q3.1 15.6,12.21 15.47,12.33 15.6,12.46 15.6,13.22 14.96,13.86 14.33,13.86 R2_EP_DR.2 14.2,13.86 12.8,13.86 12.68,13.98 12.68,14.37 12.3,14.75 12.3,16.14 12.04,16.4 12.04,21.1 12.3,21.35 12.3,21.86 11.66,22.49 10.52,22.49 J1.2
GND  (via drill 0.3)
  Top 0.127: 35.66,23.76 34.9,23.76 34.9,22.37 C11.2 | 35.66,23.76 35.66,24.4 C1.2 35.66,24.53 35.66,26.05 35.79,26.18 35.79,26.43 | 35.79,21.61 35.54,21.35 35.54,20.97 C3.2 | 35.79,21.61 35.79,22.75 35.66,22.88 35.66,23.76 | 35.79,26.43 35.66,26.56 35.66,26.69 34.9,27.45 34.9,27.7 34.52,27.7 X1.4 34.39,27.7 33.5,27.7 33.38,27.57 33.38,26.3 33.89,25.8 33.89,24.78 C2.2 33.89,24.65 33.89,23.26 33.25,22.62 33.25,22.49 33.12,22.37 32.62,22.37 32.49,22.24 32.49,21.86 U1.P$78 32.23,21.48 32.23,21.22 | 35.79,26.43 X1.2 | C25.2 40.49,7.51 40.49,7.76 40.24,7.76 39.35,8.65 C24.1 39.22,8.78 v39.22,9.67 | 32.23,21.22 31.22,21.22 30.97,21.48 | 32.23,21.22 33.12,21.22 U1.P$F23 | 28.68,22.37 28.55,22.24 28.55,21.61 | 28.68,22.37 28.81,22.49 U1.P$B7 | 28.68,22.37 28.68,22.62 28.55,22.75 28.55,22.88 29.06,23.38 29.95,23.38 31.85,25.29 31.98,25.29 31.98,24.14 C13.2 | 30.84,17.92 29.82,17.92 U1.P$88 | 30.84,17.92 U1.P$89 | 30.84,17.92 U1.P$74 | 32.23,19.06 32.23,17.92 U1.P$90 | 29.06,19.7 28.55,19.19 U1.P$83 28.55,19.06 U1.P$87 | 29.82,19.7 30.33,19.7 U1.P$74 | 29.82,19.7 29.06,19.7 | 29.82,19.7 29.82,19.19 U1.P$84 | 29.82,19.7 U1.P$74 | U1.P$85 30.97,19.19 30.97,19.45 U1.P$74 | 29.06,19.7 28.55,20.21 U1.P$79 | 29.06,19.7 U1.P$74 | U1.P$80 29.82,20.33 U1.P$74 | U1.P$81 30.84,20.33 30.58,20.33 U1.P$74 | 32.23,19.06 U1.P$86 | 32.23,19.06 U1.P$74 | U1.P$82 32.11,20.21 32.11,19.83 31.98,19.7 30.58,19.7 U1.P$74 | 28.55,21.61 U1.P$75 | 28.55,21.61 U1.P$74 | U1.P$76 29.69,21.48 29.19,20.97 U1.P$74 | 30.97,21.48 U1.P$77 | 30.97,21.48 U1.P$74 | 32.23,21.22 U1.P$74 | C12.2 23.34,23.51 23.6,23.51 23.6,22.37 C15.2 23.6,21.99 23.73,21.86
  Top 0.127: 23.73,21.86 23.98,21.61 25.38,21.61 25.38,21.99 C10.2 | 25.25,19.19 23.34,19.19 23.09,19.45 | 25.25,19.19 25.5,19.19 IC1.D2 | 23.09,19.45 23.09,20.97 C8.2 23.09,21.1 23.09,21.61 23.34,21.86 23.73,21.86 | 25.25,19.19 C18.2 | 21.82,15.89 21.82,16.91 C37.1 21.82,17.03 21.82,17.29 21.95,17.41 21.95,18.18 | 21.82,15.89 21.31,15.89 R9.1 | 21.82,15.89 22.84,15.89 22.96,16.02 24.11,16.02 24.23,15.89 24.23,15 C16.2 24.23,14.87 v24.23,14.37 24.23,13.98 21.57,13.98 21.57,14.62 C21.2 | 21.95,18.18 21.95,18.3 22.2,18.56 22.2,19.45 C14.2 22.33,19.45 23.09,19.45 | 21.95,18.18 C38.1 | 14.71,14.49 14.84,14.49 14.96,14.37 14.96,14.24 15.73,13.48 | 14.71,14.49 14.33,14.49 R2_EP_DR.1 | 15.73,13.48 15.85,13.6 15.85,14.49 C1-EP-DR.2 | 15.73,13.48 15.85,13.48 15.98,13.6 18.27,13.6 18.39,13.73 C39.2 18.39,15 v18.39,15.76 | 14.71,14.49 14.71,15.25 15.09,15.64 15.09,17.29 14.96,17.41 13.95,17.41 D4.1 | EPD_C12.1 3.53,7 5.56,7 EPD_C11.1 5.69,7 7.85,7 EPD_C10.1 7.98,7 10.14,7 EPD_C9.1 10.26,7 v11.15,7 | C30.1 20.42,23.38 20.42,22.88 19.28,21.73 19.28,20.84 20.04,20.08 20.04,18.3 C5.2 20.04,18.18 20.04,15.64 v19.92,15.51 | EPD_C8.1 12.93,7 14.45,7 14.58,6.87 16.11,6.87 EPD_C6.1 16.23,6.87 17.38,6.87 17.63,7.13 17.63,8.65 17.76,8.78 17.76,10.17 18.14,10.56 v18.14,11.06 | v27.66,15.89 27.66,14.49 C20.2 | R2_USB.2 15.09,27.07 18.01,27.07 18.77,27.83 19.79,27.83 19.79,28.84 J4.A12_B1 19.79,28.97 19.79,29.35 19.66,29.48 18.77,29.48 J4.SH4 | 4.8,25.16 4.8,26.69 C34.2 | 4.8,25.16 5.18,24.78 7.22,24.78 7.34,24.65 7.34,23.76 7.72,23.76 J1.MP1 | 11.53,19.57 11.53,16.14 11.79,15.89 11.79,15.13 11.66,15 10.52,15 J1.17
  Top 0.127: 11.53,19.57 10.52,19.57 J1.8 | EPD_C7.1 10.39,27.19 10.39,27.95 10.26,28.08 9.5,28.08 9.38,28.21 9.38,29.48 EPD_C5.1 9.38,29.61 v9.38,30.75 | 14.96,33.42 15.09,33.29 15.09,31.26 IC3.9 | 14.96,33.42 13.82,33.42 R3.1 13.69,33.42 12.17,33.42 12.04,33.54 11.66,33.54 10.65,34.56 9.88,34.56 9.76,34.43 9.5,34.43 8.87,33.8 4.3,33.8 1.76,31.26 1.76,25.16 2.14,24.78 4.42,24.78 4.8,25.16 | 15.6,33.16 15.6,31.26 IC3.8 | 15.6,33.16 15.34,33.42 14.96,33.42 | 15.6,33.16 18.27,33.16 18.65,33.54 J4.SH2 18.77,33.67 19.66,34.56 26.39,34.56 27.28,33.67 J4.SH1 27.41,33.54 27.41,33.29 28.55,32.15 28.81,32.15 29.19,32.53 29.19,32.78 29.57,33.16 30.46,33.16 30.97,33.67 32.87,33.67 33.38,33.16 33.5,33.16 | v11.53,21.61 11.53,19.57 | 24.49,5.09 24.11,5.48 21.19,5.48 20.8,5.86 13.69,5.86 13.44,5.6 13.44,4.08 SW_UP.1 | 24.49,5.09 24.49,4.08 SW_ENT.1 | 24.49,5.09 26.01,3.57 26.01,2.68 26.27,2.43 27.54,2.43 TP_BAT_GND.TP 27.66,2.43 28.42,2.43 28.81,2.05 28.81,1.79 29.69,0.9 29.95,0.9 30.33,1.28 30.58,1.28 31.09,1.79 31.09,2.05 31.22,2.17 31.22,2.68 31.09,2.81 31.09,6.11 31.47,6.49 | J2.3 28.55,8.52 29.69,8.52 J2.5 29.82,8.52 30.2,8.52 30.2,7.76 31.47,6.49 | C33.2 44.43,7.38 44.43,3.32 43.54,2.43 42.27,2.43 TP_GND.TP 42.14,2.43 40.62,2.43 40.49,2.55 40.49,6.24 35.92,6.24 | 35.92,6.24 35.54,5.86 35.54,4.33 SW_DN.1 | 33.5,6.49 35.16,6.49 35.41,6.24 35.92,6.24 | 33.5,6.49 31.47,6.49 | 40.74,17.92 40.74,19.06 40.62,19.19 38.71,19.19 | 38.71,19.19 37.44,19.19 37.31,19.32 C22.2 | 40.74,17.29 41.51,17.29 41.63,17.41 41.63,18.68 42.52,19.57 43.41,19.57 44.43,20.59 44.43,21.48 44.3,21.61 43.79,21.61 IC2.B3
  Top 0.127: 40.74,17.92 40.74,17.29 | 40.74,17.92 C29.1 | IC9.C3 38.84,11.06 38.58,11.06 IC9.C2 38.46,11.06 38.08,11.06 | 37.19,11.06 38.08,11.06 | 37.19,11.44 37.19,11.57 C23.2 | 37.19,11.44 37.19,11.06 | 37.19,11.44 38.08,11.44 IC9.B1 | 38.08,11.06 IC9.C1 | 35.66,19.06 34.65,19.06 34.52,18.94 34.52,17.8 35.16,17.16 35.66,17.16 35.66,16.52 C6.2 | 35.66,19.06 35.66,19.7 C9.2 | 35.66,19.06 35.66,18.43 C4.2 | 37.19,11.06 36.3,11.06 35.92,11.44 35.92,11.83 | 35.92,11.83 35.92,14.62 35.66,14.87 35.66,16.4 C6.2 | 40.74,17.29 40.74,16.52 40.62,16.4 35.79,16.4 C6.2 | C7.2 25.38,24.4 25.38,23.64 26.65,23.64 26.65,24.4 C17.1 26.65,24.53 26.65,25.54 v26.27,25.92 | 28.04,25.54 28.81,26.3 28.81,27.32 C42.2 28.81,27.45 28.81,28.97 28.93,29.1 28.93,30.37 30.46,31.89 31.85,31.89 D3.2 31.98,31.89 33,31.89 33,32.65 33.5,33.16 | 28.04,25.54 27.41,25.54 27.41,25.92 C19.2 27.41,26.05 27.41,27.45 26.65,27.45 R1_USB.1 26.52,27.45 26.27,27.45 26.14,27.57 26.14,28.84 J4.A1_B12 26.14,28.97 26.14,29.35 26.27,29.48 J4.SH3 | 28.04,25.54 28.42,25.54 28.68,25.29 30.46,25.29 30.58,25.16 30.71,25.29 30.71,26.18 C43.2 | 44.68,26.18 44.68,25.92 44.94,25.67 44.94,24.27 44.55,23.89 44.55,23.26 C32.1 44.55,23.13 44.55,22.75 44.43,22.62 44.3,22.75 42.9,22.75 42.39,22.24 42.39,21.99 42.78,21.61 IC2.B1 | 44.68,26.18 45.32,26.18 R_TYPE_SEL.1 | 39.86,26.56 39.86,25.92 | 39.86,26.56 40.11,26.56 40.62,26.05 41.76,26.05 U3.1 41.89,26.05 42.9,26.05 | 42.9,25.16 42.9,25.29 U3.9 | 42.9,25.16 42.9,24.65 41.89,24.65 U3.4 | 42.9,25.16 43.79,25.16 U3.6 | 42.9,25.16 U3.9 | 42.9,26.05 42.9,25.41 U3.9 | 39.86,26.56 39.86,27.45 38.84,28.46 38.84,32.15 SJ1.1 38.84,32.27 38.84,33.42 33.76,33.42 33.5,33.16
  Top 0.127: 44.68,26.18 44.68,26.69 44.55,26.81 43.03,26.81 42.9,26.69 42.9,26.05 | 38.71,21.61 38.71,24.02 39.86,25.16 39.86,25.92 | 38.71,21.61 38.71,19.19 | 39.86,25.92 C31.1 | 33.5,6.49 33.5,10.43 34.9,11.83 35.92,11.83 | 38.71,21.61 35.79,21.61
  Bottom 0.127: v39.22,9.67 39.35,9.79 39.47,9.79 39.86,10.17 39.86,10.43 32.49,17.8 32.23,17.8 U1.P$90 | U1.P$87 27.66,17.03 v27.66,15.89 26.77,15.89 26.39,15.51 25.63,15.51 24.36,14.24 | 24.36,14.24 22.84,12.72 | 22.84,12.72 21.19,11.06 v18.14,11.06 14.07,7 v11.15,7 | 22.84,12.72 22.71,12.72 v19.92,15.51 19.66,15.76 v18.39,15.76 | 24.36,14.24 v24.23,14.37 | v11.53,21.61 11.28,21.61 9.38,23.51 9.38,23.89 8.61,24.65 8.61,29.99 v9.38,30.75 13.19,34.56 17.76,34.56 18.65,33.67 J4.SH2 18.65,33.54 18.65,29.61 J4.SH4 | v26.27,25.92 26.27,28.46 J4.SH3
JJ  (via drill 0.3)
  Top 0.127: v34.39,21.22 34.39,21.48 33.63,21.48 U1.P$E24 | v37.57,23.26 37.57,22.62 L3.2 | v28.3,23.26 28.3,22.49 U1.P$B5 | v22.2,15.38 22.46,15.64 22.96,15.64 23.09,15.76 23.73,15.76 23.73,15 C16.1 | v19.53,17.41 18.9,18.05 18.9,19.32 v19.53,19.95 | v23.09,22.88 23.09,22.37 C15.1 | v24.11,22.11 24.74,22.11 C10.1 | v20.8,30.37 20.3,30.88 17.88,30.88 17.12,30.11 v17.12,28.34
  Bottom 0.127: v37.57,23.26 36.43,23.26 v34.39,21.22 33.76,21.22 31.47,23.51 29.31,23.51 29.06,23.26 v28.3,23.26 27.92,23.26 v20.8,30.37 | v22.2,15.38 21.57,15.38 v19.53,17.41 | v19.53,19.95 19.79,19.95 20.93,21.1 21.31,21.1 22.58,22.37 | 22.58,22.37 v23.09,22.88 23.85,22.11 v24.11,22.11 | v17.12,28.34 17.38,28.34 19.79,25.92 19.79,25.29 21.44,23.64 21.44,23.51 22.58,22.37
LX1
  Top 0.127: IC9.B2 38.58,11.44 38.84,11.44 IC9.B3 38.97,11.44 39.22,11.44 39.22,11.57 39.47,11.83 39.47,11.95 40.24,12.72 42.27,12.72 43.16,11.83 43.16,10.56 41.89,9.29 41.89,7.13 41.25,6.49 35.54,6.49 35.28,6.75 35.28,8.02 L7.1
LX2
  Top 0.127: IC9.D2 38.46,10.68 38.84,10.68 IC9.D3 38.97,10.68 39.09,10.68 39.47,11.06 39.47,11.44 39.73,11.7 39.73,11.83 40.36,12.46 42.14,12.46 42.9,11.7 42.9,10.68 41.63,9.41 41.63,7.25 41.12,6.75 37.57,6.75 37.44,6.87 37.44,8.02 L7.2
N$1  (via drill 0.3)
  Top 0.127: v25.76,19.7 25.76,19.45 25.89,19.32 IC1.D1 | v21.57,20.21 21.57,18.94 21.19,18.56 21.19,17.8 20.55,17.16 20.55,15.89 21.06,15.38 21.19,15.38 R9.2
  Bottom 0.127: v25.76,19.7 25.12,19.7 24.49,19.06 22.71,19.06 v21.57,20.21
N$2
  Top 0.127: IC9.D1 38.08,10.68 37.82,10.68 37.7,10.81 37.44,10.81 37.06,10.43 37.06,9.54 36.93,9.41 36.43,9.41 R4.2
N$3  (via drill 0.3)
  Top 0.127: v37.57,10.3 38.08,10.3 IC9.E1 | v39.35,10.3 39.47,10.43 39.98,10.43 R2.2
  Bottom 0.127: v39.35,10.3 v37.57,10.3
N$4
  Top 0.127: R3.2 13.82,32.78 13.82,30.88 13.19,30.24 14.33,29.1 14.45,29.1 14.58,29.22 14.58,29.61 IC3.1
N$5
  Top 0.127: U1.P$AC5 28.3,17.03 27.92,17.03 27.79,16.91 27.41,16.91 27.28,17.03 26.9,17.03 26.39,16.52 26.39,15.51 26.27,15.38 26.27,15.13 26.39,15 26.39,14.49 C20.1
N$6  (via drill 0.3)
  Top 0.127: v26.01,21.22 26.9,21.22 27.03,21.35 27.16,21.35 27.28,21.22 27.54,21.22 U1.P$F2 | v24.74,19.95 24.74,20.59 C18.1 | v22.2,24.4 19.53,24.4 19.41,24.53 19.41,25.8 X2.1
  Bottom 0.127: v24.74,19.95 v26.01,21.22 24.87,22.37 24.87,22.75 23.98,23.64 22.96,23.64 v22.2,24.4
N$7
  Top 0.127: 27.16,23.38 27.16,24.4 C17.2 | 27.16,23.38 27.16,22.88 27.41,22.62 27.41,21.86 27.54,21.73 U1.P$D2 | 27.16,23.38 25,23.38 24.87,23.26 24.36,23.26 24.11,23.51 24.11,23.89 23.34,24.65 22.58,24.65 21.95,25.29 21.95,25.8 X2.2
N$8  (via drill 0.3)
  Top 0.127: v23.6,21.35 25.5,21.35 25.63,21.48 25.63,21.73 25.89,21.99 27.03,21.99 U1.P$C1 | v19.53,19.32 19.53,18.3 C5.1
  Bottom 0.127: v23.6,21.35 21.95,21.35 21.44,20.84 21.06,20.84 v19.53,19.32
N$9
  Top 0.127: U1.P$N24 33.63,19.45 35.16,19.45 35.16,19.7 C9.1
N$10
  Top 0.127: U1.P$B3 27.79,22.49 27.79,23.38 28.17,23.76 28.17,24.4 L2.1
N$11
  Top 0.127: L3.1 36.68,22.62 36.68,25.54 36.81,25.67 36.81,28.46 36.68,28.59 35.66,28.59 35.41,28.84 33.38,28.84 33.12,28.59 33.12,28.08 32.87,27.83 32.87,27.07 30.71,24.91 30.46,24.91 30.33,25.03 29.19,25.03 29.19,24.53 L2.2
N$12
  Top 0.127: 34.9,20.72 35.03,20.72 35.16,20.84 C3.1 | 34.9,20.72 33.89,20.72 33.76,20.84 33.5,20.84 33.38,20.72 33.12,20.72 U1.P$H23 | 34.9,20.72 35.03,20.59 35.16,20.59 35.41,20.33 35.79,20.33 35.92,20.46 37.06,20.46 37.06,20.72 L1.1
N$13
  Top 0.127: 36.93,17.67 37.7,17.67 ANT1.1 36.93,17.67 | 36.93,17.67 36.17,17.67 35.92,17.41 35.28,17.41 35.16,17.54 35.16,18.3 C4.1 | 36.93,17.67 36.93,19.32 C22.1 36.93,19.45 36.93,20.08 37.06,20.21 37.95,20.21 37.95,20.72 L1.2
N$14
  Top 0.127: U1.P$D23 33.12,21.73 33.38,21.73 33.5,21.86 33.63,21.86 33.76,21.73 34.65,21.73 34.78,21.61 35.41,21.61 35.41,22.24 C11.1
N$15
  Top 0.127: U1.P$A23 33.12,23 33.25,23 33.38,23.13 33.38,24.65 C2.1 33.38,24.78 33.38,25.92 33.12,26.18 33.12,27.7 33.38,27.95 33.38,28.46 33.5,28.59 35.28,28.59 35.41,28.46 35.41,27.7 35.79,27.7 X1.3
N$16
  Top 0.127: U1.P$B24 33.63,22.49 34.39,22.49 34.65,22.75 34.65,23.89 34.78,24.02 35.16,24.02 35.16,24.4 C1.1 35.16,24.53 35.16,26.05 34.9,26.3 34.9,26.56 34.52,26.56 X1.1
N$17  (via drill 0.3)
  Top 0.127: 4.3,27.7 4.3,28.46 L5.2 | 4.3,27.7 4.3,27.57 4.17,27.45 3.28,27.45 2.9,27.07 2.9,25.8 C2-EP-DR.2 | v18.39,12.84 18.65,12.59 18.65,11.7 17.76,11.7 Q3.3 | v15.85,17.92 15.85,19.7 15.47,20.08 15.47,24.53 15.6,24.65 v15.73,24.65 16.74,24.65 D5.2 | 4.3,27.7 5.69,27.7 7.22,26.18 7.98,26.18 9.12,25.03 v9.12,24.78
  Bottom 0.127: v18.39,12.84 18.14,12.84 15.85,15.13 v15.85,17.92 | v9.12,24.78 15.6,24.78 v15.73,24.65
N$18
  Top 0.127: C2-EP-DR.1 2.39,25.8 2.39,31.51 4.42,33.54 6.96,33.54 8.99,31.51 10.39,31.51 11.53,30.37 11.53,29.35 13.31,27.57 13.31,26.81 15.22,24.91 15.22,20.59 14.07,20.59 D2.1 13.95,20.59 13.19,20.59 13.19,19.95 15.73,17.41 17.25,17.41 D4.2
N$20  (via drill 0.3)
  Top 0.127: v45.44,25.16 45.44,25.54 R_TYPE_SEL.2 | v45.44,27.83 43.67,29.61 43.67,30.75 | 43.67,30.75 44.3,30.75 R1_EP_DR.1 | 43.67,30.75 40.49,30.75 40.36,30.88 40.36,32.15 SJ1.2
  Bottom 0.127: v45.44,25.16 45.57,25.29 45.57,27.7 v45.44,27.83
N$22
  Top 0.127: U1.P$A18 31.6,23 31.47,23.13 31.47,24.02 C13.1
N$23
  Top 0.127: C32.2 44.94,23.13 44.94,22.75 44.55,22.37 44.05,22.37 43.92,22.49 43.67,22.49 43.28,22.11 IC2.A2
N$24
  Top 0.127: J1.4 10.39,21.61 10.01,21.61 9.88,21.73 9.88,24.14 10.14,24.4 10.14,25.8 6.96,28.97 6.96,30.24 6.33,30.88 EPD_C2.2
N$25  (via drill 0.3)
  Top 0.127: v6.07,28.84 9.88,25.03 9.88,24.53 9.63,24.27 9.63,21.48 10.01,21.1 10.39,21.1 J1.5 | v5.06,29.86 5.06,30.62 4.04,31.64 EPD_C1.2
  Bottom 0.127: v5.06,29.86 v6.07,28.84
N$28
  Top 0.127: J1.18 10.52,14.49 10.77,14.49 12.17,13.1 12.17,12.46 16.11,8.52 16.11,8.27 EPD_C6.2
N$29
  Top 0.127: J1.19 10.39,14.11 10.01,14.11 9.25,14.87 9.25,23.38 9.38,23.51 9.38,24.4 9.63,24.65 9.63,24.91 8.1,26.43 7.34,26.43 5.56,28.21 5.56,31.38 5.82,31.64 7.34,31.64 8.87,30.11 8.87,27.45 9.88,26.43 11.03,26.43 11.66,27.07 EPD_C7.2
N$30
  Top 0.127: J1.20 10.52,13.48 10.77,13.48 12.68,11.57 12.68,8.4 12.8,8.27 EPD_C8.2
N$31
  Top 0.127: R1_USB.2 26.52,26.94 26.14,26.94 25,28.08 24.49,28.08 24.23,28.34 24.23,28.84 J4.A5
N$32
  Top 0.127: J1.22 10.39,12.59 8.99,12.59 8.49,12.08 8.49,8.78 7.98,8.27 EPD_C10.2
N$33
  Top 0.127: C31.2 40.24,25.92 40.24,25.03 R8.1
N$34
  Top 0.127: J1.24 10.52,11.44 10.52,9.16 10.9,8.78 10.9,7.89 10.65,7.63 4.04,7.63 3.53,8.14 EPD_C12.2
N$35  (via drill 0.3)
  Top 0.127: v17.63,29.99 17.63,28.21 17.12,27.7 15.09,27.7 R2_USB.1 | v17.63,31.26 20.55,31.26 v20.8,31 | v21.82,29.99 21.57,29.73 21.44,29.73 21.31,29.61 21.31,28.97 J4.B5
  Bottom 0.127: v17.63,31.26 v17.63,29.99 | v21.82,29.99 v20.8,31
N$36
  Top 0.127: C29.2 41.12,17.92 41.12,18.81 41.76,19.45 41.76,19.83 41.38,20.21 R7.1
OUT+
  Top 0.127: IC2.A3 43.79,22.11 45.32,22.11 45.57,21.86 45.57,18.94 44.68,18.05 43.16,18.05 TP_OP.TP
P0.13/1.5D  (via drill 0.3)
  Top 0.127: R5.1 20.8,22.24 20.8,23.38 C30.2 20.8,23.51 20.8,23.64 20.68,23.76 19.41,23.76 v16.23,20.59 | v10.65,5.6 10.65,4.08 SW_UP.2
  Bottom 0.127: v16.23,20.59 14.71,20.59 11.79,17.67 11.79,17.41 8.23,13.86 8.23,8.02 v10.65,5.6
P1.01/1.6C
  Top 0.127: R_PWR_EPD.1 18.9,7.89 19.53,7.89 19.53,8.14 19.41,8.27 19.41,9.79 DMG2305UX-7.1
PMIC_INT  (via drill 0.3)
  Top 0.127: v26.52,17.92 26.52,18.05 IC1.A1 | v27.54,18.18 27.66,18.3 27.66,18.68 U1.P$T2
  Bottom 0.127: v26.52,17.92 27.28,17.92 v27.54,18.18
PREVGH  (via drill 0.3)
  Top 0.127: v9.12,13.1 10.39,13.1 J1.21 | v9.12,12.08 9.12,11.7 9.63,11.19 9.63,10.68 9.88,10.43 9.88,9.29 9.5,8.91 9.5,8.4 10.14,8.4 EPD_C9.2 | v12.55,17.41 12.3,17.67 12.3,20.97 12.68,21.35 12.68,22.49 14.71,24.53 14.71,24.65 13.44,24.65 D5.1
  Bottom 0.127: v9.12,12.08 v9.12,13.1 9.12,13.98 v12.55,17.41
PREVGL
  Top 0.127: 12.04,6.11 11.91,6.24 11.91,6.87 11.53,7.25 11.53,11.95 11.41,12.08 10.52,12.08 J1.23 | 12.04,6.11 16.99,6.11 17.88,7 17.88,8.52 18.01,8.65 18.01,10.05 18.39,10.43 18.39,10.68 18.9,11.19 18.9,14.11 19.15,14.37 19.15,16.02 18.65,16.52 18.65,20.46 18.52,20.59 17.63,20.59 D2.2 | 12.04,6.11 2.64,6.11 2.52,6.24 2.52,9.03 2.64,9.16 3.91,9.16 4.8,8.27 5.56,8.27 EPD_C11.2
RESE  (via drill 0.3)
  Top 0.127: v28.68,32.65 29.44,33.42 30.33,33.42 30.84,33.92 33,33.92 33.25,33.67 42.01,33.67 45.06,30.62 45.06,30.11 44.43,30.11 R1_EP_DR.2 | v23.85,27.95 23.6,27.7 23.34,27.7 23.22,27.57 18.9,27.57 18.14,26.81 18.14,24.14 16.61,22.62 16.36,22.62 15.73,21.99 15.73,20.21 17.63,18.3 18.27,18.3 18.39,18.18 18.39,16.4 18.9,15.89 18.9,14.49 18.65,14.24 18.65,13.6 18.39,13.35 17.63,13.35 16.61,12.33 16.61,11.19 16.49,11.06 15.73,11.06 Q3.2 15.6,11.06 14.2,11.06 12.42,12.84 12.42,14.24 12.04,14.62 12.04,16.02 11.79,16.27 11.79,21.22 12.04,21.48 12.04,21.73 11.66,22.11 11.41,22.11 11.28,21.99 10.52,21.99 J1.3
  Bottom 0.127: v28.68,32.65 28.42,32.65 27.92,32.15 25,32.15 23.22,30.37 23.09,30.37 22.71,29.99 22.71,28.84 23.6,27.95 v23.85,27.95
RESET  (via drill 0.3)  (1 unrouted)
  Top 0.127: v30.71,11.06 30.2,10.56 30.2,9.79 29.82,9.79 J2.6 | v28.68,15.13 30.33,15.13 TP_RESET.TP
  Bottom 0.127: v30.71,11.06 29.69,10.05 25.5,10.05 24.36,8.91 24.23,8.91 23.85,9.29 23.85,12.08 25.38,13.6 27.16,13.6 v28.68,15.13
SCL/1.4C
  Top 0.127: IC2.C1 42.78,21.1 42.01,21.1 41.89,21.22 41.89,22.11 42.78,23 43.28,23 44.68,24.4 44.68,25.54 44.55,25.67 43.92,25.67 U3.7
SCL/2.4C  (via drill 0.3)  (1 unrouted)
  Top 0.127: v36.55,10.56 36.68,10.56 36.81,10.43 36.81,9.92 36.43,9.92 R4.1 36.3,9.92 35.28,9.92 R17.2 35.16,9.92 33.89,9.92 33.76,9.79 33.76,9.54 v34.01,9.29 | v36.43,12.59 38.84,12.59 39.09,12.84 39.98,12.84 40.11,12.97 42.39,12.97 42.46,12.91 TP_SCL.TP | v26.39,18.56 26.27,18.43 IC1.B1 | v13.95,30.24 14.58,30.24 IC3.12
  Bottom 0.127: v36.55,10.56 36.55,12.46 v36.43,12.59 | v26.39,18.56 24.74,18.56 24.49,18.81 19.41,18.81 19.03,19.19 19.03,19.83 | 19.03,19.83 19.03,20.21 20.3,21.48 20.3,24.4 19.53,25.16 19.53,25.8 17.5,27.83 16.36,27.83 v13.95,30.24 | v34.01,9.29 29.31,4.59 26.39,4.59 25.89,4.08 21.31,4.08 20.17,5.22 12.3,5.22 8.49,9.03 8.49,13.73 12.04,17.29 12.04,17.54 12.42,17.92 14.58,17.92 16.49,19.83 19.03,19.83
SDA/1.4C  (1 unrouted)
SDA/2.4C  (via drill 0.3)
  Top 0.127: TP_SDA.TP 10.14,33.29 10.52,33.29 10.52,31.77 11.15,31.13 12.3,31.13 R18.2 13.57,31.13 13.57,31 12.93,30.37 12.93,30.11 14.2,28.84 15.09,28.84 | 15.09,28.84 15.09,29.61 IC3.2 | v26.52,19.95 26.52,19.32 26.01,18.81 25.89,18.81 IC1.C1 | v26.52,19.95 27.03,19.95 U1.P$L1 | v40.62,10.3 40.62,10.43 40.11,10.94 R2.1 | 15.09,28.84 15.09,28.34 15.22,28.21 16.36,28.21 v16.49,28.34 | v24.23,20.84 24.49,21.1 25.38,21.1 26.01,20.46 26.01,20.08 26.14,19.95 v26.52,19.95
  Bottom 0.127: v40.62,10.3 40.62,11.44 40.87,11.7 40.87,13.73 31.35,23.26 29.44,23.26 26.52,20.33 v26.52,19.95 | v16.49,28.34 16.99,28.84 17.25,28.84 20.04,26.05 20.04,25.41 21.69,23.76 21.69,23.64 22.08,23.26 22.84,23.26 22.96,23.38 23.85,23.38 24.62,22.62 24.62,21.22 v24.23,20.84
SWDCLK  (via drill 0.3)
  Top 0.127: v34.65,17.03 34.65,17.29 34.52,17.41 33.63,17.41 U1.P$AA24 | v36.17,15.51 36.17,13.48 v36.43,13.22 | v27.54,12.21 27.54,11.06 28.17,10.43 28.17,9.92 28.42,9.67 J2.4 | v24.36,9.54 24.36,5.98 25.89,4.46 28.81,4.46 29.19,4.08 29.19,2.43 29.82,2.43 TP_SWDCLK.TP
  Bottom 0.127: v36.17,15.51 v34.65,17.03 | v36.43,13.22 28.55,13.22 27.92,12.59 | v27.54,12.21 27.92,12.59 | v24.36,9.54 24.11,9.79 24.11,11.95 25.5,13.35 27.16,13.35 27.92,12.59
SWDIO
  Top 0.127: U1.P$AC24 33.63,16.91 34.14,16.4 34.14,16.14 34.52,15.76 34.52,12.33 34.65,12.21 34.65,11.95 31.73,9.03 30.71,9.03 30.58,8.91 30.2,8.91 29.95,9.16 29.57,9.16 29.31,8.91 28.93,8.91 28.68,9.16 28.17,9.16 27.54,9.79 27.28,9.79 J2.2 27.16,9.79 26.52,9.79 26.27,10.05 24.23,10.05 23.85,9.67 23.85,8.91 23.09,8.14 21.82,8.14 TP_SWDIO.TP
SWO
  Top 0.127: U1.P$AD22 32.62,16.4 32.49,16.27 32.49,14.75 32.74,14.75 TP_SWO.TP
VBAT/1.2A
  Top 0.127: U3.2 41.89,25.54 41.89,25.16 U3.3 41.76,25.03 41.51,25.03 41.25,24.78 41.25,23.51 41.76,23 C27.2 41.63,22.88 41.63,22.75 40.24,21.35 TP_VBAT.TP
VBAT/2.5C
  Top 0.127: IC1.C2 25.5,18.81 24.11,18.81 23.85,18.56 23.85,17.29 22.71,16.14 22.2,16.14 22.2,16.91 C37.2
VBUS/1.5D  (via drill 0.3)
  Top 0.127: 25.12,30.11 25.12,29.1 25.25,28.97 J4.A4_B9 | 25.12,30.11 25.12,30.24 25.76,30.88 27.54,30.88 28.42,29.99 28.42,27.45 C42.1 | v25,31.13 22.33,31.13 20.68,29.48 20.68,28.97 J4.A9_B4 | 25.12,30.11 v25,30.11 | 30.58,28.34 34.01,31.77 34.39,31.77 D3.5 | 30.58,28.34 29.44,27.19 29.44,26.3 C43.1 | 30.58,28.34 v29.44,29.48
  Bottom 0.127: v25,30.11 v25,31.13 26.14,31.13 26.52,31.51 27.41,31.51 v29.44,29.48
VBUS/2.6D  (via drill 0.3)
  Top 0.127: v25,18.05 25.5,18.05 IC1.A2 | U1.P$AD2 27.54,16.52 v27.03,16.52 26.77,16.52 26.65,16.4 26.65,15.38 v26.77,15.25 | v23.34,17.54 22.33,17.54 22.33,18.18 C38.2 | v23.98,13.22 23.73,13.48 20.17,13.48 20.17,14.62 C21.1
  Bottom 0.127: v27.03,16.52 25.5,18.05 v25,18.05 24.49,17.54 v23.34,17.54 | v23.98,13.22 23.98,13.48 25.76,15.25 v26.77,15.25
VREG  (via drill 0.3)
  Top 0.127: IC9.A1 38.46,11.83 IC9.A2 38.58,11.83 38.84,11.83 IC9.A3 38.97,11.83 39.09,11.83 39.22,11.95 v39.22,12.33 | IC9.A1 37.57,11.83 37.06,12.33 36.81,12.33 36.81,11.7 C23.1 | IC9.A1 | 41.12,11.06 41.12,11.19 41.63,11.19 TP_VREG.TP 41.12,11.06 | 41.12,11.06 41.12,10.17 40.62,9.67 40.62,8.78 C24.2 | 41.12,11.06 v40.36,11.83 | v24.36,18.3 24.62,18.56 25.25,18.56 25.38,18.43 25.5,18.43 IC1.B2 | v17.88,16.4 17.88,15 C39.1 | v30.2,4.84 28.68,4.84 27.54,5.98 27.54,7.13 26.52,8.14 v24.87,8.14 | v23.34,9.41 23.34,10.68 20.8,13.22 20.04,13.22 19.41,13.86 19.41,16.65 v19.15,16.91
  Bottom 0.127: v39.22,12.33 39.86,12.33 v40.36,11.83 40.36,10.68 40.11,10.43 40.11,10.05 39.86,9.79 39.86,9.67 40.11,9.41 42.27,9.41 42.9,8.78 42.9,7.76 39.73,4.59 30.46,4.59 v30.2,4.84 | v24.36,18.3 24.11,18.56 20.04,18.56 18.77,17.29 | v17.88,16.4 18.77,17.29 | v24.87,8.14 24.36,8.65 24.11,8.65 v23.34,9.41 | 18.77,17.29 v19.15,16.91